# Altium PCB PCB Design.PcbDoc
Units mil, origin at the board's own origin, x right, y up, seen from the top; angles counter-clockwise.
Board outline 5975 x 3230 mil, 2 copper layers (Top Layer, Bottom Layer); 14 components, 49 nets, 162 pads, 18 vias.
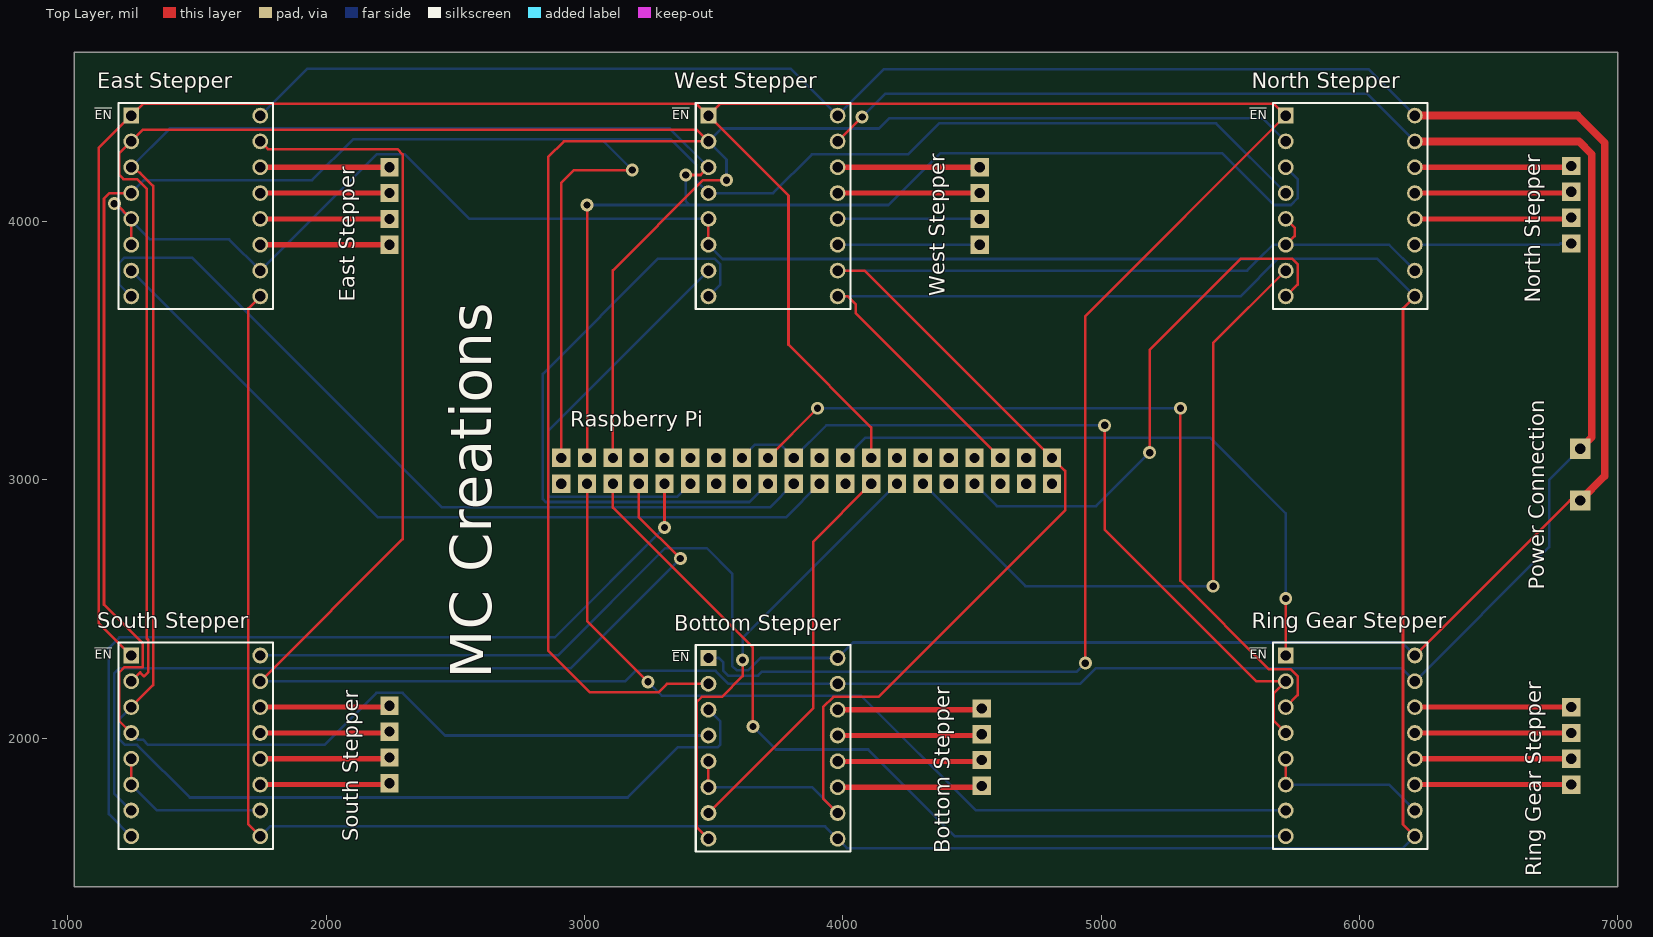
[diagram p0: Top Layer view]
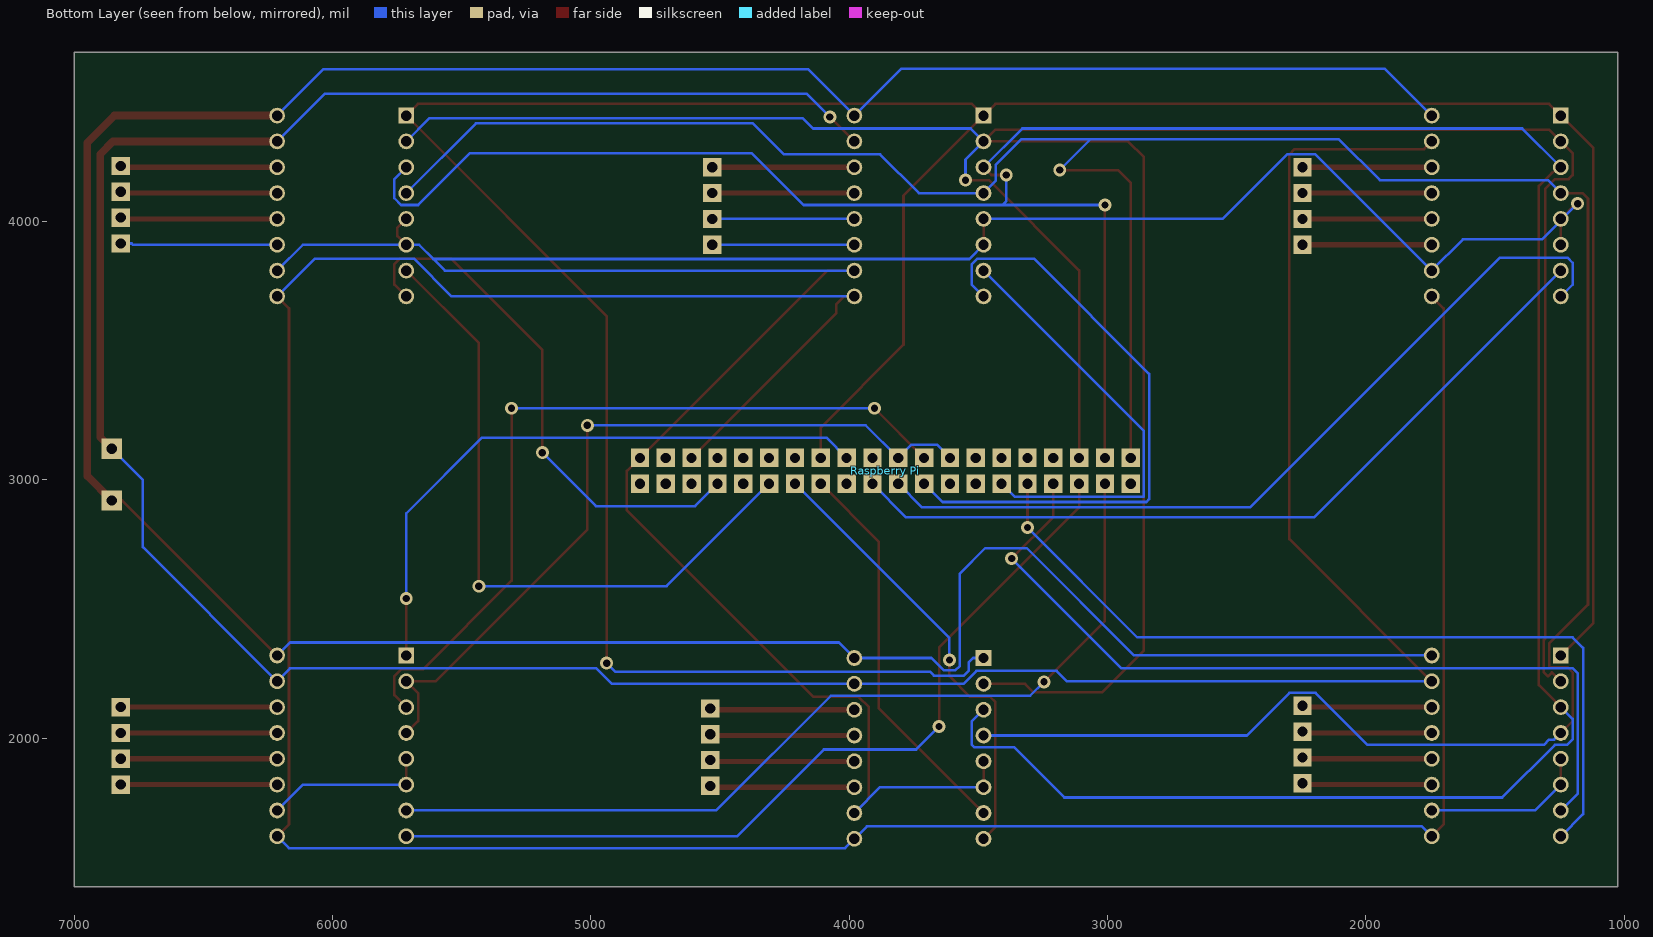
[diagram p1: Bottom Layer view, seen from below]

## Layer stack, top to bottom
Top Solder: solder mask 0.4, Solder Resist, Dk 3.5
Top Layer: signal copper 1.4
Dielectric 1: dielectric 12.6, FR-4, Dk 4.8
Bottom Layer: signal copper 1.4
Bottom Solder: solder mask 0.4, Solder Resist, Dk 3.5

## Board outline
1025,1425 1025,4655 7000,4655 7000,1425

## Design rules (kind name [scope] priority, off if disabled: settings)
Clearance [All] p1: gap=10 ignorepadtopadclearanceinfootprint=FALSE
PolygonConnect [All] p1: connectstyle=Relief reliefconductorwidth=10 reliefentries=4 polygonreliefangle="90 Angle" airgapwidth=10
RoutingVias [All] p1: holewidth=28 width=50 viastyle="Through Hole" minholewidth=28 minwidth=50 maxholewidth=28 maxwidth=50
SolderMaskExpansion [All] p1: expansion=4 istentingtop=FALSE
Width [All] p1: maxlimit=10 minlimit=10 preferedwidth=10
30 further rules are at their usual default settings.

## Classes and differential pairs
component class Sheet1: "Bottom Stepper" "East Stepper" "North Stepper" "Power Connection" "Raspberry Pi" "Ring Gear Stepper" "South Stepper" "West Stepper"

## Components (designator, comment, footprint, x,y, rotation, side; value= is the part's Value field where it differs from the comment)
"Bottom Stepper" "Stepper Connection" "Header 1x4 male" 4537.79,2015 r90 top
"Bottom Stepper" "A4988 Motor Driver" "Polo-A4988 Motor Driver_V" 3730,1960 r0 top
"East Stepper" "Stepper Connection" "Header 1x4 male" 2245,4110 r90 top
"East Stepper" "A4988 Motor Driver" "Polo-A4988 Motor Driver_V" 1495,4060 r0 top
"North Stepper" "Stepper Connection" "Header 1x4 male" 6820,4115 r90 top
"North Stepper" "A4988 Motor Driver" "Polo-A4988 Motor Driver_V" 5965,4060 r0 top
"Power Connection" "Power Connection" "Header 1x2+1 1.0mm" 6855,2920 r90 top
"Raspberry Pi" "Header 2x20" "Header 2x20 MALE" 4810,3185 r0 bottom
"Ring Gear Stepper" "Stepper Connection" "Header 1x4 male" 6820,2019.99 r90 top
"Ring Gear Stepper" "A4988 Motor Driver" "Polo-A4988 Motor Driver_V" 5965,1970 r0 top
"South Stepper" "Stepper Connection" "Header 1x4 male" 2245,2025 r90 top
"South Stepper" "A4988 Motor Driver" "Polo-A4988 Motor Driver_V" 1495,1970 r0 top
"West Stepper" "Stepper Connection" "Header 1x4 male" 4530,4110 r90 top
"West Stepper" "A4988 Motor Driver" "Polo-A4988 Motor Driver_V" 3730,4060 r0 top

## Footprints (in the part's own frame and the unit in brackets; to place one, negate y for a bottom-side part, rotate by r counter-clockwise, add the part's x,y. Pads: shape width x height; smd on the part's side, far side on the other; paste and mask are expansions set on the pad)
"Header 1x2+1 1.0mm" [mm] "2.54mm"
  rect 2x2 hole 1: 1(0,0) 2(5.08,0)
"Header 1x4 male" [mm] "2.54mm"
  rect 1.8x1.8 hole 1: 1(-5.08,0) 2(-2.54,0) 3(0,0) 4(2.54,0)
  body extent -6.35,-1.27 3.81,1.27, height 8.6
"Header 2x20 MALE" [mm]
  rect 1.8x1.8 hole 1: 1(0,5.08) 2(0,2.54) 3(-2.54,5.08) 4(-2.54,2.54) 5(-5.08,5.08) 6(-5.08,2.54) 7(-7.62,5.08) 8(-7.62,2.54) 9(-10.16,5.08) 10(-10.16,2.54) 11(-12.7,5.08) 12(-12.7,2.54) 13(-15.24,5.08) 14(-15.24,2.54) 15(-17.78,5.08) 16(-17.78,2.54) 17(-20.32,5.08) 18(-20.32,2.54) 19(-22.86,5.08) 20(-22.86,2.54) 21(-25.4,5.08) 22(-25.4,2.54) 23(-27.94,5.08) 24(-27.94,2.54) 25(-30.48,5.08) 26(-30.48,2.54) 27(-33.02,5.08) 28(-33.02,2.54) 29(-35.56,5.08) 30(-35.56,2.54) 31(-38.1,5.08) 32(-38.1,2.54) 33(-40.64,5.08) 34(-40.64,2.54) 35(-43.18,5.08) 36(-43.18,2.54) 37(-45.72,5.08) 38(-45.72,2.54) 39(-48.26,5.08) 40(-48.26,2.54)
  body extent -49.53,1.27 1.27,6.35, height 8.6
"Polo-A4988 Motor Driver_V" [mm] "THD, 16-Leads, Body 20.3x15.2mm, Pitch 2.54mm"
  rect 1.55x1.55 hole 1.02: 1(-6.35,8.89)
  round 1.55 hole 1.02: 2(-6.35,6.35) 3(-6.35,3.81) 4(-6.35,1.27) 5(-6.35,-1.27) 6(-6.35,-3.81) 7(-6.35,-6.35) 8(-6.35,-8.89) 9(6.35,-8.89) 10(6.35,-6.35) 11(6.35,-3.81) 12(6.35,-1.27) 13(6.35,1.27) 14(6.35,3.81) 15(6.35,6.35) 16(6.35,8.89)
  silkscreen extent -9.91,-10.15 7.6,10.15, body extent -7.62,-10.16 7.62,10.16, height 5.04

## Part data
"Bottom Stepper" "East Stepper" "North Stepper" "Ring Gear Stepper" "South Stepper" "West Stepper": library part "Header 4x1"
"Bottom Stepper" "East Stepper" "North Stepper" "Ring Gear Stepper" "South Stepper" "West Stepper": library part CMP-00024-00002-2, "Stepper Motor Driver Carrier, 3 to 5.5 V, 2 A, 16-Pin THD", Case/Package=A4988MotorDriver, Manufacturer="Pololu Robotics & Electronics", Package Description="16-Pin Through Hole Device, Body 20.3 x 15.2 mm, Pitch 2.54 mm", Datasheet URL=https://www.pololu.com/file/0J1082/a4988-stepper-motor-driver-carrier-dimension-diagram.pdf, Datasheet Version=Dec-15, Mounting Technology=TH, Package Reference="A4988 Motor Driver", RoHS Compliant=Unknown
"Power Connection": library part "Header 2x1"

## Via types
v1: diameter 50, hole 28, Top Layer to Bottom Layer, 18 vias

## Nets (pads, with @x,y where several pads share a name; then routed paths per layer and width w, separated by ;. In a path a pad name is that pad's centre, name@x,y a point inside that pad or via, vN(x,y) a via of type N, cw(c..) or ccw(c..) an arc to the next point about the centre after c; other vN are vias at no path point)
"MOT GND": "Bottom Stepper.15" "East Stepper.15" "North Stepper.15" "Power Connection.2" "Ring Gear Stepper.15" "South Stepper.15" "West Stepper.15" | length 12809.7
  Top Layer w10: 1745,2220 2296,2771 2296,4260 2275.57,4280.43 1774.57,4280.43 1745,4310 ; 3980,4310 v1(4075,4405)
  Top Layer w30: 6215,4310 6850,4310 6900,4260 6900,3165 6855,3120
  Bottom Layer w10: 1745,2220 3157,2220 3197,2260 3507.68,2260 3557.68,2210 3980,2210 4918.95,2210 4978.95,2270 6165,2270 6215,2220 6735,2740 6735,3000 6855,3120 ; v1(4075,4405) 4164,4494 6031,4494 6215,4310
"MOT VCC": "Bottom Stepper.16" "East Stepper.16" "North Stepper.16" "Power Connection.1" "Ring Gear Stepper.16" "South Stepper.16" "West Stepper.16" | length 12972.8
  Top Layer w10: 6215,2320 6815,2920 6855,2920
  Top Layer w30: 6215,4410 6845,4410 6950,4305 6950,3015 6855,2920
  Bottom Layer w10: 1745,2320 2897,2320 3312,2735 3474,2735 3572,2637 3572,2280 3590,2262 3634,2262 3682,2310 3980,2310 4040,2370 6165,2370 6215,2320 ; 1745,4410 1926,4591 3799,4591 3980,4410 4160,4590 6035,4590 6215,4410
"NetBottom Stepper_1": "Bottom Stepper.1"@4537.79,1815 "Bottom Stepper.11" | length 559.9
  Top Layer w10: 4532.79,1810 4537.79,1815
  Top Layer w20: 3980,1810 4532.79,1810
"NetBottom Stepper_2": "Bottom Stepper.2"@4537.79,1915 "Bottom Stepper.12" | length 559.9
  Top Layer w10: 4532.79,1910 4537.79,1915
  Top Layer w20: 3980,1910 4532.79,1910
"NetBottom Stepper_3": "Bottom Stepper.3"@4537.79,2015 "Bottom Stepper.13" | length 559.9
  Top Layer w10: 4532.79,2010 4537.79,2015
  Top Layer w20: 3980,2010 4532.79,2010
"NetBottom Stepper_4": "Bottom Stepper.4"@4537.79,2115 "Bottom Stepper.14" | length 559.9
  Top Layer w10: 4532.79,2110 4537.79,2115
  Top Layer w20: 3980,2110 4532.79,2110
"NetBottom Stepper_7": "Bottom Stepper.7" "Raspberry Pi.15" | length 1536
  Top Layer w10: 3480,1710 3886,2116 3886,2761 4110,2985
"NetBottom Stepper_8": "Bottom Stepper.8" "Raspberry Pi.13" | length 1761.2
  Top Layer w10: 3480,1610 3434,1656 3434,2140 3454,2160 3532,2160 3612,2240 v1(3612,2302)
  Bottom Layer w10: v1(3612,2302) 3612,2387 4210,2985
"NetEast Stepper_1": "East Stepper.1"@2245,3910 "East Stepper.11" | length 500
  Top Layer w20: 1745,3910 2245,3910
"NetEast Stepper_2": "East Stepper.2"@2245,4010 "East Stepper.12" | length 500
  Top Layer w20: 1745,4010 2245,4010
"NetEast Stepper_3": "East Stepper.3"@2245,4110 "East Stepper.13" | length 500
  Top Layer w20: 1745,4110 2245,4110
"NetEast Stepper_4": "East Stepper.4"@2245,4210 "East Stepper.14" | length 500
  Top Layer w20: 1745,4210 2245,4210
"NetEast Stepper_7": "East Stepper.7" "Raspberry Pi.19" | length 3114.4
  Bottom Layer w10: 1245,3810 2200,2855 3780,2855 3910,2985
"NetEast Stepper_8": "East Stepper.8" "Raspberry Pi.21" | length 3207
  Bottom Layer w10: 1245,3710 1199,3756 1199,3840 1219,3860 1481,3860 2448,2893 3718,2893 3810,2985
"NetNorth Stepper_1": "North Stepper.1"@6820,3915 "North Stepper.11" | length 607.1
  Bottom Layer w10: 6215,3910 6773,3910 6778,3915 6820,3915
"NetNorth Stepper_2": "North Stepper.2"@6820,4015 "North Stepper.12" | length 607.1
  Top Layer w10: 6815,4010 6820,4015
  Top Layer w20: 6215,4010 6815,4010
"NetNorth Stepper_3": "North Stepper.3"@6820,4115 "North Stepper.13" | length 607.1
  Top Layer w10: 6815,4110 6820,4115
  Top Layer w20: 6215,4110 6815,4110
"NetNorth Stepper_4": "North Stepper.4"@6820,4215 "North Stepper.14" | length 607.1
  Top Layer w10: 6815,4210 6820,4215
  Top Layer w20: 6215,4210 6815,4210
"NetNorth Stepper_7": "North Stepper.7" "Raspberry Pi.11" | length 2626.8
  Top Layer w10: v1(5434,2588) 5434,3529 5715,3810
  Bottom Layer w10: 4310,2985 4707,2588 v1(5434,2588)
"NetNorth Stepper_8": "North Stepper.8" "Raspberry Pi.7" | length 2069.2
  Top Layer w10: v1(5188,3105) 5188,3502 5542,3856 5740,3856 5761,3835 5761,3756 5715,3710
  Bottom Layer w10: 4510,2985 4597,2898 4981,2898 v1(5188,3105)
"NetRaspberry Pi_23": "Raspberry Pi.23" "West Stepper.8" | length 2413.9
  Bottom Layer w10: 3480,3710 3526,3756 3526,3834 3504,3856 3285,3856 2839,3410 2839,2925 2850,2914 3639,2914 3710,2985
"NetRaspberry Pi_29": "Raspberry Pi.29" "West Stepper.7" | length 1705.4
  Bottom Layer w10: 3410,2985 3359,2934 2859,2934 2859,3189 3480,3810
"NetRaspberry Pi_31": "Raspberry Pi.31" "South Stepper.8" | length 3278.6
  Top Layer w10: v1(3310,2815) 3310,2985
  Bottom Layer w10: 1245,1620 1159,1706 1159,2349 1200,2390 2885,2390 v1(3310,2815)
"NetRaspberry Pi_33": "Raspberry Pi.33" "South Stepper.7" | length 3290.4
  Top Layer w10: 3210,2985 3210,2856 v1(3371,2695)
  Bottom Layer w10: 1245,1720 1179,1786 1179,2250 1200,2271 2947,2271 v1(3371,2695)
"NetRaspberry Pi_35": "Raspberry Pi.35" "Ring Gear Stepper.8" | length 3403.5
  Top Layer w10: 3110,2985 3110,2892 3652,2350 v1(3652,2045)
  Bottom Layer w10: v1(3652,2045) 3741,1956 4098,1956 4434,1620 5715,1620
"NetRaspberry Pi_37": "Raspberry Pi.37" "Ring Gear Stepper.7" | length 3540
  Top Layer w10: 3010,2985 3010,2454 v1(3246,2218)
  Bottom Layer w10: v1(3246,2218) 3300,2164 4071,2164 4515,1720 5715,1720
"NetRing Gear Stepper_1": "Ring Gear Stepper.1"@6820,1819.99 "Ring Gear Stepper.11" | length 605
  Top Layer w20: 6215,1820 6820,1819.99
"NetRing Gear Stepper_2": "Ring Gear Stepper.2"@6820,1919.99 "Ring Gear Stepper.12" | length 605
  Top Layer w20: 6215,1920 6820,1919.99
"NetRing Gear Stepper_3": "Ring Gear Stepper.3"@6820,2019.99 "Ring Gear Stepper.13" | length 605
  Top Layer w20: 6215,2020 6820,2019.99
"NetRing Gear Stepper_4": "Ring Gear Stepper.4"@6820,2119.99 "Ring Gear Stepper.14" | length 605
  Top Layer w20: 6215,2120 6820,2119.99
"NetRing Gear Stepper_5": "Ring Gear Stepper.5" "Ring Gear Stepper.6" "Ring Gear Stepper.10" | length 641.4
  Top Layer w10: 5715,1820 5715,1920
  Bottom Layer w10: 5715,1820 6115,1820 6215,1720
"NetSouth Stepper_1": "South Stepper.1"@2245,1825 "South Stepper.11" | length 502.1
  Top Layer w10: 2240,1820 2245,1825
  Top Layer w20: 1745,1820 2240,1820
"NetSouth Stepper_2": "South Stepper.2"@2245,1925 "South Stepper.12" | length 502.1
  Top Layer w10: 2240,1920 2245,1925
  Top Layer w20: 1745,1920 2240,1920
"NetSouth Stepper_3": "South Stepper.3"@2245,2025 "South Stepper.13" | length 502.1
  Top Layer w10: 2240,2020 2245,2025
  Top Layer w20: 1745,2020 2240,2020
"NetSouth Stepper_4": "South Stepper.4"@2245,2125 "South Stepper.14" | length 502.1
  Top Layer w10: 2240,2120 2245,2125
  Top Layer w20: 1745,2120 2240,2120
"NetSouth Stepper_5": "South Stepper.5" "South Stepper.6" "South Stepper.10" | length 641.4
  Top Layer w10: 1245,1820 1245,1920
  Bottom Layer w10: 1245,1820 1345,1720 1745,1720
"NetWest Stepper_1": "West Stepper.1"@4530,3910 "West Stepper.11" | length 550
  Bottom Layer w10: 3980,3910 4530,3910
"NetWest Stepper_2": "West Stepper.2"@4530,4010 "West Stepper.12" | length 550
  Bottom Layer w10: 3980,4010 4530,4010
"NetWest Stepper_3": "West Stepper.3"@4530,4110 "West Stepper.13" | length 550
  Top Layer w20: 3980,4110 4530,4110
"NetWest Stepper_4": "West Stepper.4"@4530,4210 "West Stepper.14" | length 550
  Top Layer w20: 3980,4210 4530,4210
"Pi GND": "Bottom Stepper.9" "East Stepper.9" "North Stepper.9" "Raspberry Pi.6" "Ring Gear Stepper.9" "South Stepper.9" "West Stepper.9" | length 12061.1
  Top Layer w10: 1745,1620 1699,1666 1699,3664 1745,3710 ; 3980,3710 4020,3710 4050,3680 4050,3645 4610,3085 ; 6215,1620 6169,1666 6169,3664 6215,3710
  Bottom Layer w10: 1745,1620 1783,1658 3932,1658 3980,1610 4016,1574 6169,1574 6215,1620 ; 3980,3710 5539,3710 5685,3856 6069,3856 6215,3710
"Pi VCC": "Bottom Stepper.5" "Bottom Stepper.6" "Bottom Stepper.10" "East Stepper.5" "East Stepper.6" "East Stepper.10" "North Stepper.5" "North Stepper.6" "North Stepper.10" "Raspberry Pi.2" "West Stepper.5" "West Stepper.6" "West Stepper.10" | length 11268.1
  Top Layer w10: v1(1180,4069) 1186,4069 1245,4010 1245,3910 ; 3480,1810 3480,1910 ; 3480,3910 3480,4010 ; 3980,1710 3924,1766 3924,2120 3964,2160 4139,2160 4861,2882 4861,3034 4810,3085 4085,3810 3980,3810 ; 5715,3910 5749,3944 5749,3976 5715,4010
  Bottom Layer w10: v1(1180,4069) 1318,3931 1624,3931 1745,3810 2196,4261 2304,4261 2555,4010 3480,4010 ; 3480,1810 3880,1810 3980,1710 ; 3480,3910 3535,3855 5610.16,3855 ; 3980,3810 5565.16,3810 5610.16,3855 ; 6215,3810 6115,3910 5715,3910 5665.16,3910 5610.16,3855
"Ring Gear Enable": "Raspberry Pi.18" "Ring Gear Stepper.1"@5715,2320 | length 2408.7
  Top Layer w10: 5715,2320 v1(5715,2540)
  Bottom Layer w10: 4010,3085 4088,3163 5422,3163 5715,2870 v1(5715,2540)
"Ring Gear MS1": "Raspberry Pi.22" "Raspberry Pi.26" "Ring Gear Stepper.2"@5715,2220 "Ring Gear Stepper.4"@5715,2020 | length 3084.1
  Top Layer w10: v1(5014,3211) 5014,2808 5602,2220 5715,2220 5669,2174 5669,2066 5715,2020
  Bottom Layer w10: 3610,3085 3661,3136 3759,3136 3810,3085 3936,3211 v1(5014,3211)
"Ring Gear MS2": "Raspberry Pi.24" "Ring Gear Stepper.3"@5715,2120 | length 3089.8
  Top Layer w10: 3710,3085 v1(3902,3277) ; v1(5307,3277) 5307,2610 5651,2266 5735,2266 5761,2240 5761,2166 5715,2120
  Bottom Layer w10: v1(3902,3277) v1(5307,3277)
"Turning Enable": "Bottom Stepper.1"@3480,2310 "East Stepper.1"@1245,4410 "North Stepper.1"@5715,4410 "Raspberry Pi.16" "South Stepper.1"@1245,2320 "West Stepper.1"@3480,4410 | length 12292.6
  Top Layer w10: 1245,2320 1119.49,2445.51 1119.49,4284.49 1245,4410 1290.51,4455.51 3434.49,4455.51 3480,4410 ; 4110,3085 4110,3203 3790,3523 3790,4100 3480,4410 ; v1(4939,2290) 4939,3634 5715,4410 5669.49,4455.51 3525.51,4455.51 3480,4410
  Bottom Layer w10: 3480,2310 3520,2310 3537.94,2292.06 3537.94,2260 3555.94,2242 3672,2242 3687,2257 4906,2257 v1(4939,2290)
"Turning MS1": "Bottom Stepper.2"@3480,2210 "East Stepper.2"@1245,4310 "North Stepper.2"@5715,4310 "Raspberry Pi.36" "South Stepper.2"@1245,2220 "West Stepper.2"@3480,4310 | length 11572.7
  Top Layer w10: 1245,2220 1279.49,2254.49 1295,2238.98 1310.51,2254.49 1310.51,2380.51 1305.51,2385.51 1305.51,4125.49 1267,4164 1215,4164 1199.49,4179.51 1199.49,4264.49 1245,4310 1290.51,4355.51 3434.49,4355.51 3480,4310 2920,4310 2859,4249 2859,2340 3022,2177 3286,2177 3319,2210 3480,2210 ; 3110,3085 3110,3811 3459,4160 v1(3550,4160)
  Bottom Layer w10: v1(3550,4160) 3550,4240 3480,4310 3530,4360 4140,4360 4180,4400 5625,4400 5715,4310
"Turning MS2": "Bottom Stepper.3"@3480,2110 "East Stepper.3"@1245,4210 "North Stepper.3"@5715,4210 "Raspberry Pi.38" "South Stepper.3"@1245,2120 "West Stepper.3"@3480,4210 | length 11596.4
  Top Layer w10: 1245,2120 1330.51,2205.51 1330.51,4137.49 1280,4188 1245,4210 ; 3010,3085 v1(3010,4064) ; v1(3392,4180) 3450,4180 3480,4210
  Bottom Layer w10: 1245,2120 1199.49,2074.49 1199.49,1995 1220.49,1974 1268,1974 1472,1770 3167,1770 3361,1964 3515,1964 3526,1975 3526,2064 3480,2110 ; 1245,4210 1395,4360 3330,4360 3480,4210 ; v1(3010,4064) 3406.79,4064 ; v1(3392,4180) 3392,4078.79 3406.79,4064 ; 5715,4210 5761,4164 5761,4090 5735,4064 5669,4064 5468,4265 4378,4265 4177,4064 3406.79,4064
"Turning MS3": "Bottom Stepper.4"@3480,2010 "East Stepper.4"@1245,4110 "North Stepper.4"@5715,4110 "Raspberry Pi.40" "South Stepper.4"@1245,2020 "West Stepper.4"@3480,4110 | length 11181.9
  Top Layer w10: 1245,2020 1199,2066 1199,2253.49 1220,2274.49 1290.51,2274.49 1290.51,2366 1140,2516.51 1140,4089 1161,4110 1245,4110 ; 2910,3085 2910,4149 2960,4199 v1(3185,4199)
  Bottom Layer w10: 1245,2020 1270.65,1994.35 1290.16,1994.35 1310.51,1974 1993.13,1974 2194.57,2175.43 2295.43,2175.43 2460.87,2010 3480,2010 ; 1245,4110 1295,4160 1946,4160 2105,4319 3065,4319 ; v1(3185,4199) 3065,4319 ; 5715,4110 5445,4380 4373,4380 4253,4260 3880,4260 3730,4110 3480,4110 3432,4158 3432,4220 3333,4319 3065,4319
pads on no net: "Raspberry Pi.1" "Raspberry Pi.3" "Raspberry Pi.4" "Raspberry Pi.5" "Raspberry Pi.8" "Raspberry Pi.9" "Raspberry Pi.10" "Raspberry Pi.12" "Raspberry Pi.14" "Raspberry Pi.17" "Raspberry Pi.20" "Raspberry Pi.25" "Raspberry Pi.27" "Raspberry Pi.28" "Raspberry Pi.30" "Raspberry Pi.32" "Raspberry Pi.34" "Raspberry Pi.39"

## Silkscreen, mask and mechanical layers (free items; w line width, h text height)
Top Overlay:
  text "MC Creations" at 2640,2230 h160 r90

## Text inside footprints (layer, text, board x,y; h text height)
"Bottom Stepper": Top Overlay "EN" at 3340,2285 h60
"East Stepper": Top Overlay "EN" at 1105,4385 h60
"North Stepper": Top Overlay "EN" at 5575,4385 h60
"Ring Gear Stepper": Top Overlay "EN" at 5575,2295 h60
"South Stepper": Top Overlay "EN" at 1105,2295 h60
"West Stepper": Top Overlay "EN" at 3340,4385 h60